# EAGLE board Energy Meter (EAGLE 5.11)
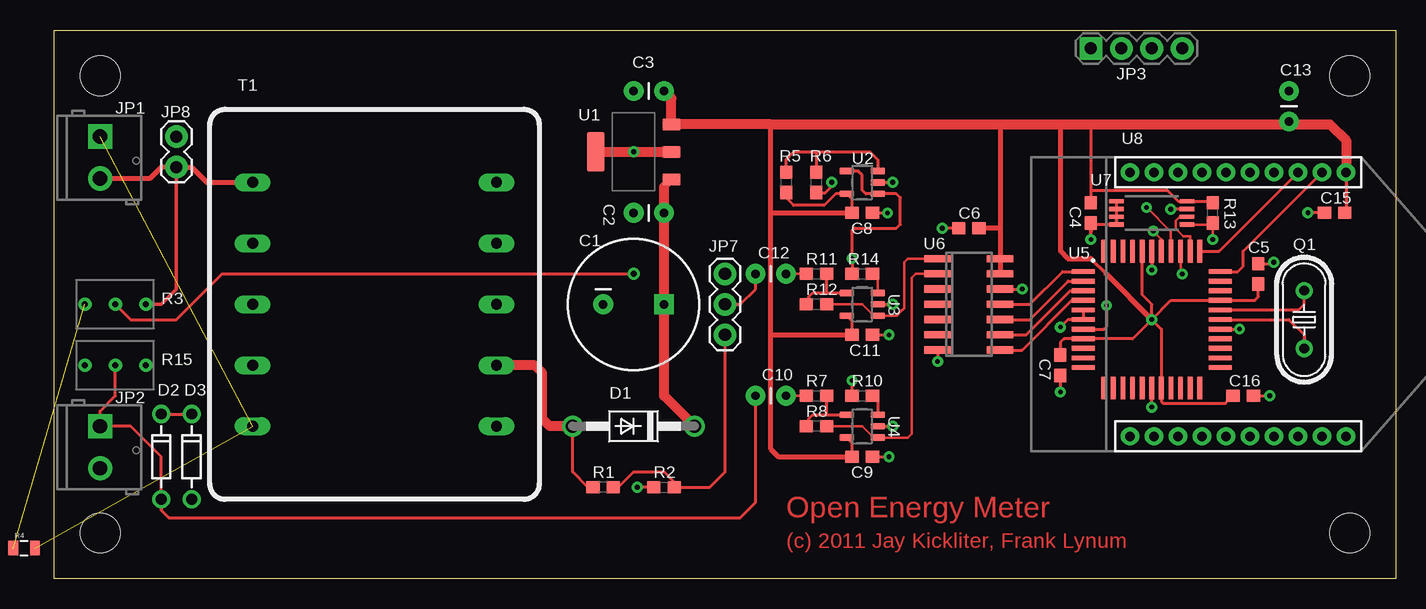
[diagram p0: board, top side]
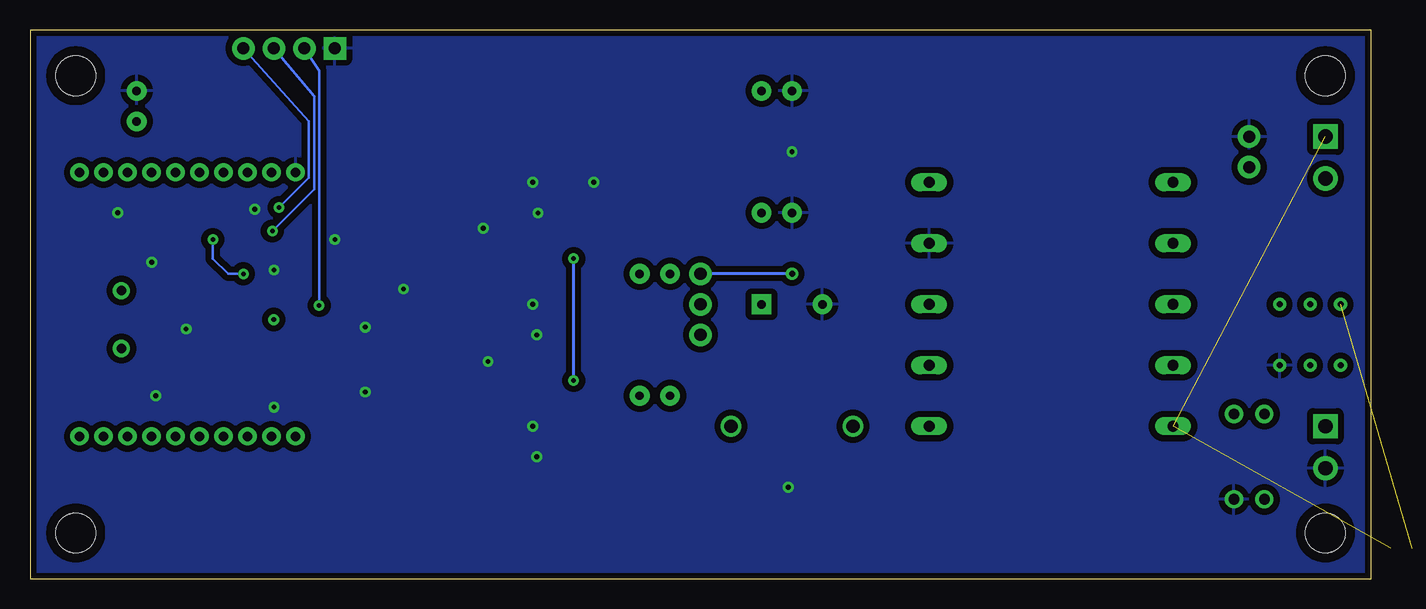
[diagram p1: board, bottom side, seen from below]

Size 111.76 x 45.72 mm. Coordinates in mm from the lower left corner, seen from the top.
Outline: 86.36,45.72 111.76,45.72 111.76,0 0,0 0,45.72 86.36,45.72
Copper layers (1*16): Top 0.035mm / dielectric 1.5mm / Bottom 0.035mm
Design rules "Advanced Circuits Design Rules *": minimum track width 6mil, minimum drill 15mil, track to track 6mil, track to pad 6mil, pad to pad 6mil, via to via 6mil, smd to smd 6mil, copper to edge 10mil, drill to drill 8mil, minimum pad ring 12mil, minimum via ring 10mil, stop-mask expansion 4mil, vias tented up to drill 25mil, thermal gap 20mil
Net classes: 0 default: width 0.203 mm, drill 0.203 mm, clearance 0.203 mm; 1 signal: width 0.152 mm, drill 0.381 mm, clearance 0.152 mm; 2 power: width 0.254 mm, drill 0.381 mm, clearance 0.203 mm; 3 hv: width 0.406 mm, drill 0.381 mm, clearance 0.254 mm

## Footprints (pad centres in the part's own frame; a part is rotated, then mirrored left to right if it is on the bottom)
CPOL-RADIAL-1000UF-25V = drill 0.7 pad 1.651 square: 1 2.54,0 | drill 0.7 pad 1.651 round: 2 -2.54,0
CAP-PTH-SMALL = drill 0.7 pad 1.651 round: 1 0,0; 2 2.54,0
0603-CAP = smd 1.1 x 1: 1 -0.85,0; 2 0.85,0
DO41-10 = drill 1.118 round: A 5.08,0; C -5.08,0
DIODE-ZENER = drill 0.9 round: P$1 -3.556,0; P$2 3.556,0
SCREWTERMINAL-3.5MM-2 = drill 1.2 pad 2.032 square: 1 0,0 | drill 1.2 pad 2.032 round: 2 3.5,0
1X04 = drill 1.016 pad 1.88 square: 1 0,0 | drill 1.016 pad 1.88 round: 2 2.54,0; 3 5.08,0; 4 7.62,0
STAND-OFF = hole 3.302: 0,0
1X03 = drill 1.016 pad 1.88 round: 1 0,0; 2 2.54,0; 3 5.08,0
1X02 = drill 1.016 pad 1.88 round: 1 0,0; 2 2.54,0
HC49U-V = drill 0.813 round: 1 -2.413,0; 2 2.413,0
RES-0603 = smd 1.1 x 1: 1 -0.85,0; 2 0.85,0
PV37Z = drill 0.5 round: 1 2.54,0; 2 0,0; 3 -2.54,0
0805 = smd 0.8 x 1.2: 1 -0.9,0; 2 0.9,0
EI30-15.5 = drill 0.9 long: P1 0,0; P2 0,-5.08; P3 0,-10.16; P4 0,-15.24; P5 0,-20.32; P6 20.32,-20.32; P7 20.32,-15.24; P8 20.32,-10.16; P9 20.32,-5.08; P10 20.32,0
SOT223 = smd 0.991 x 1.499: 1 -2.3,-3.15; 2 0,-3.15; 3 2.3,-3.15 | smd 3.302 x 1.499: 4 0,3.15
SOT23-5 = smd 0.55 x 1.2: 1 -0.95,-1.3; 2 0,-1.3; 3 0.95,-1.3; 4 0.95,1.3; 5 -0.95,1.3
LQFP-44 = smd 1.9 x 0.4: 1 -5.7,4; 2 -5.7,3.2; 3 -5.7,2.4; 4 -5.7,1.6; 5 -5.7,0.8; 6 -5.7,0; 7 -5.7,-0.8; 8 -5.7,-1.6; 9 -5.7,-2.4; 10 -5.7,-3.2; 11 -5.7,-4; 23 5.7,-4; 24 5.7,-3.2; 25 5.7,-2.4; 26 5.7,-1.6; 27 5.7,-0.8; 28 5.7,0; 29 5.7,0.8; 30 5.7,1.6; 31 5.7,2.4; 32 5.7,3.2; 33 5.7,4 | smd 0.4 x 1.9: 12 -4,-5.7; 13 -3.2,-5.7; 14 -2.4,-5.7; 15 -1.6,-5.7; 16 -0.8,-5.7; 17 0,-5.7; 18 0.8,-5.7; 19 1.6,-5.7; 20 2.4,-5.7; 21 3.2,-5.7; 22 4,-5.7; 34 4,5.7; 35 3.2,5.7; 36 2.4,5.7; 37 1.6,5.7; 38 0.8,5.7; 39 0,5.7; 40 -0.8,5.7; 41 -1.6,5.7; 42 -2.4,5.7; 43 -3.2,5.7; 44 -4,5.7
SO-14 = smd 0.6 x 2.2: 1 -3.81,-2.6; 2 -2.54,-2.6; 3 -1.27,-2.6; 4 0,-2.6; 5 1.27,-2.6; 6 2.54,-2.6; 7 3.81,-2.6; 8 3.81,2.6; 9 2.54,2.6; 10 1.27,2.6; 11 0,2.6; 12 -1.27,2.6; 13 -2.54,2.6; 14 -3.81,2.6
TSSOP8 = smd 0.35 x 1.2: 1 -0.975,-2.925; 2 -0.325,-2.925; 3 0.325,-2.925; 4 0.975,-2.925; 5 0.975,2.925; 6 0.325,2.925; 7 -0.325,2.925; 8 -0.975,2.925
XBEE-1 = drill 0.8 pad 1.524 round: 1 -11,20; 2 -11,18; 3 -11,16; 4 -11,14; 5 -11,12; 6 -11,10; 7 -11,8; 8 -11,6; 9 -11,4; 10 -11,2; 11 11,2; 12 11,4; 13 11,6; 14 11,8; 15 11,10; 16 11,12; 17 11,14; 18 11,16; 19 11,18; 20 11,20

## Placement (x,y rotation side)
C1  470u  [CPOL-RADIAL-1000UF-25V]  48.26,22.86 0 top
C2  10u  [CAP-PTH-SMALL]  50.8,30.48 180 top
C3  10u  [CAP-PTH-SMALL]  50.8,40.64 180 top
C4  0.1u  [0603-CAP]  86.36,30.48 270 top
C5  0.1u  [0603-CAP]  100.33,25.4 90 top
C6  0.1u  [0603-CAP]  76.2,29.21 180 top
C7  0.1u  [0603-CAP]  83.82,17.78 270 top
C8  0.1u  [0603-CAP]  67.31,30.48 0 top
C9  0.1u  [0603-CAP]  67.31,10.16 0 top
C10  1u  [CAP-PTH-SMALL]  58.42,15.24 0 top
C11  0.1u  [0603-CAP]  67.31,20.32 0 top
C12  1u  [CAP-PTH-SMALL]  58.42,25.4 0 top
C13  10u  [CAP-PTH-SMALL]  102.87,38.1 90 top
C15  0.1u  [0603-CAP]  106.68,30.48 180 top
C16  0.1u  [0603-CAP]  99.06,15.24 0 top
D1  1N4004  [DO41-10]  48.26,12.7 180 top
D2  [DIODE-ZENER]  8.89,10.16 270 top
D3  [DIODE-ZENER]  11.43,10.16 270 top
JP1  120 V RMS  [SCREWTERMINAL-3.5MM-2]  3.81,36.83 270 top
JP2  [SCREWTERMINAL-3.5MM-2]  3.81,12.7 270 top
JP3  [1X04]  86.36,44.2 0 top
JP4  STAND-OFF  [STAND-OFF]  3.81,41.91 0 top
JP5  STAND-OFF  [STAND-OFF]  3.81,3.81 0 top
JP6  STAND-OFF  [STAND-OFF]  107.95,3.81 0 top
JP7  [1X03]  55.88,20.32 90 top
JP8  [1X02]  10.16,36.83 270 top
JP9  STAND-OFF  [STAND-OFF]  107.95,41.91 0 top
Q1  5 MHz  [HC49U-V]  104.14,21.59 90 top
R1  [RES-0603]  45.72,7.62 180 top
R2  [RES-0603]  50.8,7.62 0 top
R3  2k  [PV37Z]  5.08,22.86 0 top
R4  180k  [0805]  -2.54,2.54 0 top
R5  100k  [RES-0603]  60.96,33.02 270 top
R6  100k  [RES-0603]  63.5,33.02 90 top
R7  120k  [RES-0603]  63.5,15.24 0 top
R8  180k  [RES-0603]  63.5,12.7 180 top
R10  68k  [RES-0603]  67.31,15.24 0 top
R11  1M  [RES-0603]  63.5,25.4 0 top
R12  1M  [RES-0603]  63.5,22.86 180 top
R13  10k  [RES-0603]  96.52,30.48 90 top
R14  500k  [RES-0603]  67.31,25.4 0 top
R15  200  [PV37Z]  5.08,17.78 0 top
T1  [EI30-15.5]  16.51,33.02 0 top
U1  LT1129  [SOT223]  48.26,35.56 90 top
U2  OPA344NA  [SOT23-5]  67.31,33.02 90 top
U3  OPA344NA  [SOT23-5]  67.31,22.86 90 top
U4  OPA344NA  [SOT23-5]  67.31,12.7 90 top
U5  P8X32A-Q44  [LQFP-44]  91.44,21.59 0 top
U6  MCP3204  [SO-14]  76.2,22.86 270 top
U7  24LC512  [TSSOP8]  91.44,30.48 270 top
U8  XBEE-1B1  [XBEE-1]  87.63,22.86 270 top

## Library data of the parts
C1 = my_favorites; PARTNO: 565-1677-ND
C2 C3 C13 = SparkFun; PARTNO: 718-1178-ND
C4-C9 C11 C15 C16 = my_favorites; PARTNO: 399-5784-1-ND
C10 C12 = SparkFun; PARTNO: BC1151CT-ND
D1 = diode; PARTNO: 641-1311-1-ND
D2 D3 = SparkFun; PARTNO: 1N5222B-TPCT-ND
JP1 JP2 = my_favorites; PARTNO: 281-1400-ND
JP3 R1 R2 R4-R8 R10-R14 T1 U6 = my_favorites
JP4-JP9 = SparkFun
Q1 = SparkFun; PARTNO: XC1711-ND
R3 = my_favorites; PARTNO: 490-3034-ND
R15 = my_favorites; PARTNO: 490-3031-ND
U1 = my_favorites; PARTNO: LT1129CST-3.3#PBF-ND
U2-U4 = my_favorites; PARTNO: OPA344NACT-ND
U5 = parallax_propeller; PARTNO: P8X32A-Q44-ND
U7 = my_favorites; PARTNO: 24LC512-I/ST-ND
U8 = SparkFun; BOM: EXCLUDE

## Nets
6VRMS [power]: D1.A R1.2 T1.P7
ADCCLK: U5.1 U6.11
ADCCS [signal]: U5.4 U6.8
ADCDI: U5.3 U6.9
ADCDO: U5.2 U6.10
COPATOADC [signal]: R8.1 U4.1 U6.2
HVSENSE [signal]: JP7.3 R3.2
LVSENSE: JP7.1 R1.1 R2.2
N$1: R3.3 R4.1
N$2 [signal]: Q1.1 U5.28
N$3: JP1.1 R4.2 T1.P5
N$4: C1.1 C2.1 D1.C U1.1
N$5 [signal]: Q1.2 U5.29
N$6: R13.1 U5.36 U7.5
N$7: R5.1 R6.2 U2.3
N$8: R7.2 R8.2 U4.4
N$9 [power]: D2.P$1 D3.P$1
N$10: R10.2 U4.3
N$11: C10.2 R7.1
N$12 [signal]: C10.1 D2.P$2 JP2.1 R15.2
N$14: R11.2 R12.2 U3.4
N$15: C12.1 JP7.2
N$16: C12.2 R11.1
N$17: JP3.4 U5.37
N$18: R14.2 U3.3
N$19: JP3.3 U5.38
NEUTRAL [power]: JP1.2 JP8.2 R3.1 T1.P1
RESN: JP3.2 U5.7
SDA: U5.35 U7.6
UCTOXBEE: U5.34 U8.3
VDD [power]: C3.1 C4.1 C5.1 C6.1 C7.1 C8.1 C9.1 C11.1 C13.1 C15.1 C16.1 R5.2 R13.2 U1.3 U2.5 U3.5 U4.5 U5.8 U5.18 U5.30 U5.40 U6.13 U6.14 U7.8 U8.1
VGND: R10.1 R14.1 U2.1 U2.4
VOPATODC [signal]: R12.1 U3.1 U6.1
VSS [power]: C1.2 C2.2 C3.2 C4.2 C5.2 C6.2 C7.2 C8.2 C9.2 C11.2 C13.2 C15.2 C16.2 D3.P$2 JP2.2 JP3.1 JP8.1 R2.1 R6.1 R15.1 T1.P9 U1.2 U1.4 U2.2 U3.2 U4.2 U5.5 U5.6 U5.17 U5.27 U5.39 U6.7 U6.12 U7.1 U7.2 U7.3 U7.4 U7.7 U8.10
XBEETOUC: U5.33 U8.2

## Tracks (layer width: path | path; a pad name or v marks a point on that pad's centre or on a via)
6VRMS
  Top 0.254: R1.2 44.45,7.62 43.18,8.89 D1.A
  Top 0.813: D1.A 41.27,12.7 40.64,13.34 40.64,17.14 40.01,17.78 T1.P7
ADCCLK
  Top 0.254: U6.11 81.28,22.86 84.01,25.59 U5.1
ADCCS
  Top 0.254: U6.8 80.64,19.05 84.78,23.19 U5.4
ADCDI
  Top 0.254: U6.9 80.96,20.32 84.63,23.99 U5.3
ADCDO
  Top 0.254: U6.10 81.28,21.59 84.48,24.79 U5.2
COPATOADC
  Top 0.203: R8.1 67.31,12.7 68.26,11.75 U4.1 71.12,11.75 71.44,12.06 71.44,25.08 71.75,25.4 U6.2
HVSENSE  (via drill 0.5 pad 1.01)
  Top 0.254: R3.2 6.35,21.59 10.16,21.59 13.97,25.4 v48.26,25.4
  Bottom 0.254: v48.26,25.4 JP7.3
LVSENSE
  Top 0.254: R1.1 46.99,7.62 48.26,8.89 50.8,8.89 51.65,8.04 R2.2 54.61,7.62 55.88,8.89 JP7.1
N$1  (1 unrouted)
N$2
  Top 0.254: U5.28 102.87,21.59 104.14,20.32 Q1.1
N$3  (2 unrouted)
N$4
  Top 0.635: 50.8,32.65 U1.1
  Top 0.813: 50.8,32.65 C2.1 C1.1 50.8,15.24 D1.C
N$5
  Top 0.254: U5.29 103.67,22.39 104.14,22.86 Q1.2
N$6  (via drill 0.38 pad 0.89)
  Top 0.203: U5.36 93.84,25.54 v93.98,25.4 | U7.5 96.39,29.5 R13.1 | v96.52,28.26 96.52,29.5
  Top 0.254: R13.1 96.52,29.57 96.52,29.5
  Bottom 0.203: v96.52,28.26 96.52,26.67 95.25,25.4 v93.98,25.4
N$7
  Top 0.254: R5.1 60.96,34.92 61.59,35.56 63.5,35.56 | 63.5,35.56 67.94,35.56 68.61,34.9 U2.3 | 63.5,35.56 R6.2
N$8
  Top 0.254: R8.2 62.87,12.91 62.87,13.34 63.18,13.65 64.35,13.65 | 64.35,13.65 R7.2 | 64.35,13.65 U4.4
N$9
  Top 0.254: D2.P$1 D3.P$1
N$10
  Top 0.254: R10.2 68.61,14.79 U4.3
N$11
  Top 0.203: C10.2 R7.1
N$12
  Top 0.254: C10.1 58.42,6.35 57.15,5.08 9.53,5.08 8.89,5.71 D2.P$2 8.89,10.16 6.35,12.7 JP2.1 3.81,13.97 5.08,15.24 R15.2
N$14
  Top 0.203: U3.4 65.91,23.71
  Top 0.254: R12.2 62.87,23.07 62.87,23.5 63.18,23.81 64.35,23.81 | 64.35,23.81 R11.2 | 64.35,23.81 U3.4
N$15
  Top 0.254: JP7.2 57.15,22.86 58.42,24.13 C12.1
N$16
  Top 0.203: C12.2 R11.1
N$17  (via drill 0.38 pad 0.89)
  Top 0.203: U5.37 93.04,28.9 v91.01,30.93
  Bottom 0.203: v91.01,30.93 88.52,33.42 88.52,38.1 JP3.4
N$18
  Top 0.203: R14.2 68.61,24.95 U3.3
N$19  (via drill 0.38 pad 0.89)
  Top 0.203: U5.38 92.24,28.29 v91.56,28.97
  Bottom 0.203: v91.56,28.97 88.08,32.45 88.08,40.2 JP3.3
NEUTRAL
  Top 0.305: R3.1 8.89,22.86 10.16,24.13 JP8.2
  Top 0.406: T1.P1 12.7,33.02 11.43,34.29 JP8.2 8.89,34.29 7.93,33.33 JP1.2
RESN  (via drill 0.38 pad 0.89)
  Top 0.254: U5.7 87.47,20.79 87.67,20.99 v87.67,22.76
  Bottom 0.203: v87.67,22.76 87.67,42.33 JP3.2
SDA
  Top 0.203: U5.35 94.64,28.55 94.08,28.55 93.46,29.16 93.46,29.82 93.79,30.16 U7.6
UCTOXBEE
  Top 0.254: U5.34 97.06,27.29 U8.3
VDD  (via drill 0.41 pad 0.91)
  Top 0.254: R13.2 96.52,31.45 U7.8 93.64,31.45 92.71,32.38 86.36,32.38 | 86.36,32.38 C4.1 | C5.1 100.33,23.5 100.03,23.19 U5.30 93.04,23.19 v91.44,21.59 | v91.44,21.59 91.44,22.86 90.64,23.66 U5.40 | v91.44,21.59 92.24,20.79 U5.18 92.24,14.76 92.39,14.61 97.58,14.61 C16.1 | v91.44,21.59 89.84,19.99 U5.8 84.12,19.99 83.82,19.68 C7.1 | U8.1 107.63,30.58 C15.1 | R5.2 60.96,31.75 61.59,31.11 64.14,31.11 65.09,32.07 U2.5 66.46,31.62 C8.1 | C9.1 66.46,11.3 U4.5 | C11.1 66.46,21.46 U3.5 | 86.36,37.86 86.36,32.38
  Top 0.305: 86.36,26.67 87.63,25.4
  Top 0.406: U6.13 U6.14 78.8,29.21 | 78.8,29.21 C6.1 | 78.74,37.86 78.8,37.8 78.8,29.21 | 77.47,37.86 77.53,37.8 | 59.69,30.48 59.69,37.86 | 59.69,20.32 59.69,30.48 | 59.69,30.48 C8.1 | C9.1 60.33,10.16 59.69,10.79 59.69,20.32 | 59.69,20.32 C11.1 | 87.63,25.4 v91.44,21.59 | 83.82,37.86 83.82,27.3 84.45,26.67 86.36,26.67
  Top 0.813: 102.87,37.86 106.28,37.86 107.63,36.52 U8.1 | 102.87,37.86 C13.1 | 102.87,37.86 86.36,37.86 83.82,37.86 78.74,37.86 77.47,37.86 59.69,37.86 U1.3 51.41,40.03 C3.1
VGND  (via drill 0.38 pad 0.89)
  Top 0.254: R10.1 v66.46,16.51 | R14.1 v66.46,26.67 66.46,29 66.67,29.21 70.17,29.21 70.48,29.53 70.48,31.75 70.17,32.07 U2.1 67.62,32.07 67.31,32.38 67.31,33.66 67,33.97 U2.4
  Bottom 0.254: v66.46,16.51 v66.46,26.67
VOPATODC
  Top 0.203: R12.1 67.31,22.86 68.26,21.91 U3.1 70.17,21.91 70.48,22.23 70.8,22.54 70.8,26.35 71.12,26.67 U6.1
VSS  (via drill 0.38 pad 0.89, 0.41 pad 0.91)
  Top 0.254: U6.7 v73.6,18.1 | v83.82,20.95 84.45,21.59 U5.6 U5.5 | U6.12 v80.64,24.13 | C8.2 v69.43,30.48 | C5.2 101.5,26.25 v101.6,26.35 | R6.1 64.24,32.17 64.77,32.7 v64.77,33.02 | U5.27 v98.74,20.79 | C15.2 v104.46,30.48 | C11.2 v69.53,20.32 | C9.2 v69.53,10.16 | R2.1 v48.58,7.62 | U5.39 v91.44,25.72 | v91.44,14.29 U5.17 | C16.2 v101.28,15.24 | U4.2 v69.85,12.7 | U7.1 U7.2 U7.3 U7.4 86.38,29.5 v86.36,28.26 C4.2 | U3.2 v69.85,22.86 | C6.2 v73.98,29.21 | v93.03,30.8 U7.7 | U2.2 v69.85,33.02 | C7.2 v83.82,15.56
  Top 0.406: U1.4 45.72,35.56
  Top 0.813: 45.72,35.56 v48.26,35.56 U1.2
  pour Bottom (isolate 0.508): 0,45.72 111.76,45.72 111.76,0 0,0
XBEETOUC
  Top 0.254: U5.33 98.61,25.59 99.06,26.04 99.06,27.29 U8.2

## Text on the board
Top: Open Energy Meter | (c) 2011 Jay Kickliter, Frank Lynum